# Altium PCB Thermostat_PCB.PcbDoc
Units mm, origin at the board's own origin, x right, y up, seen from the top; angles counter-clockwise.
Board outline 152.4 x 101.6 mm, 2 copper layers (Top Layer, Bottom Layer); 75 components, 95 nets, 262 pads, 48 vias.
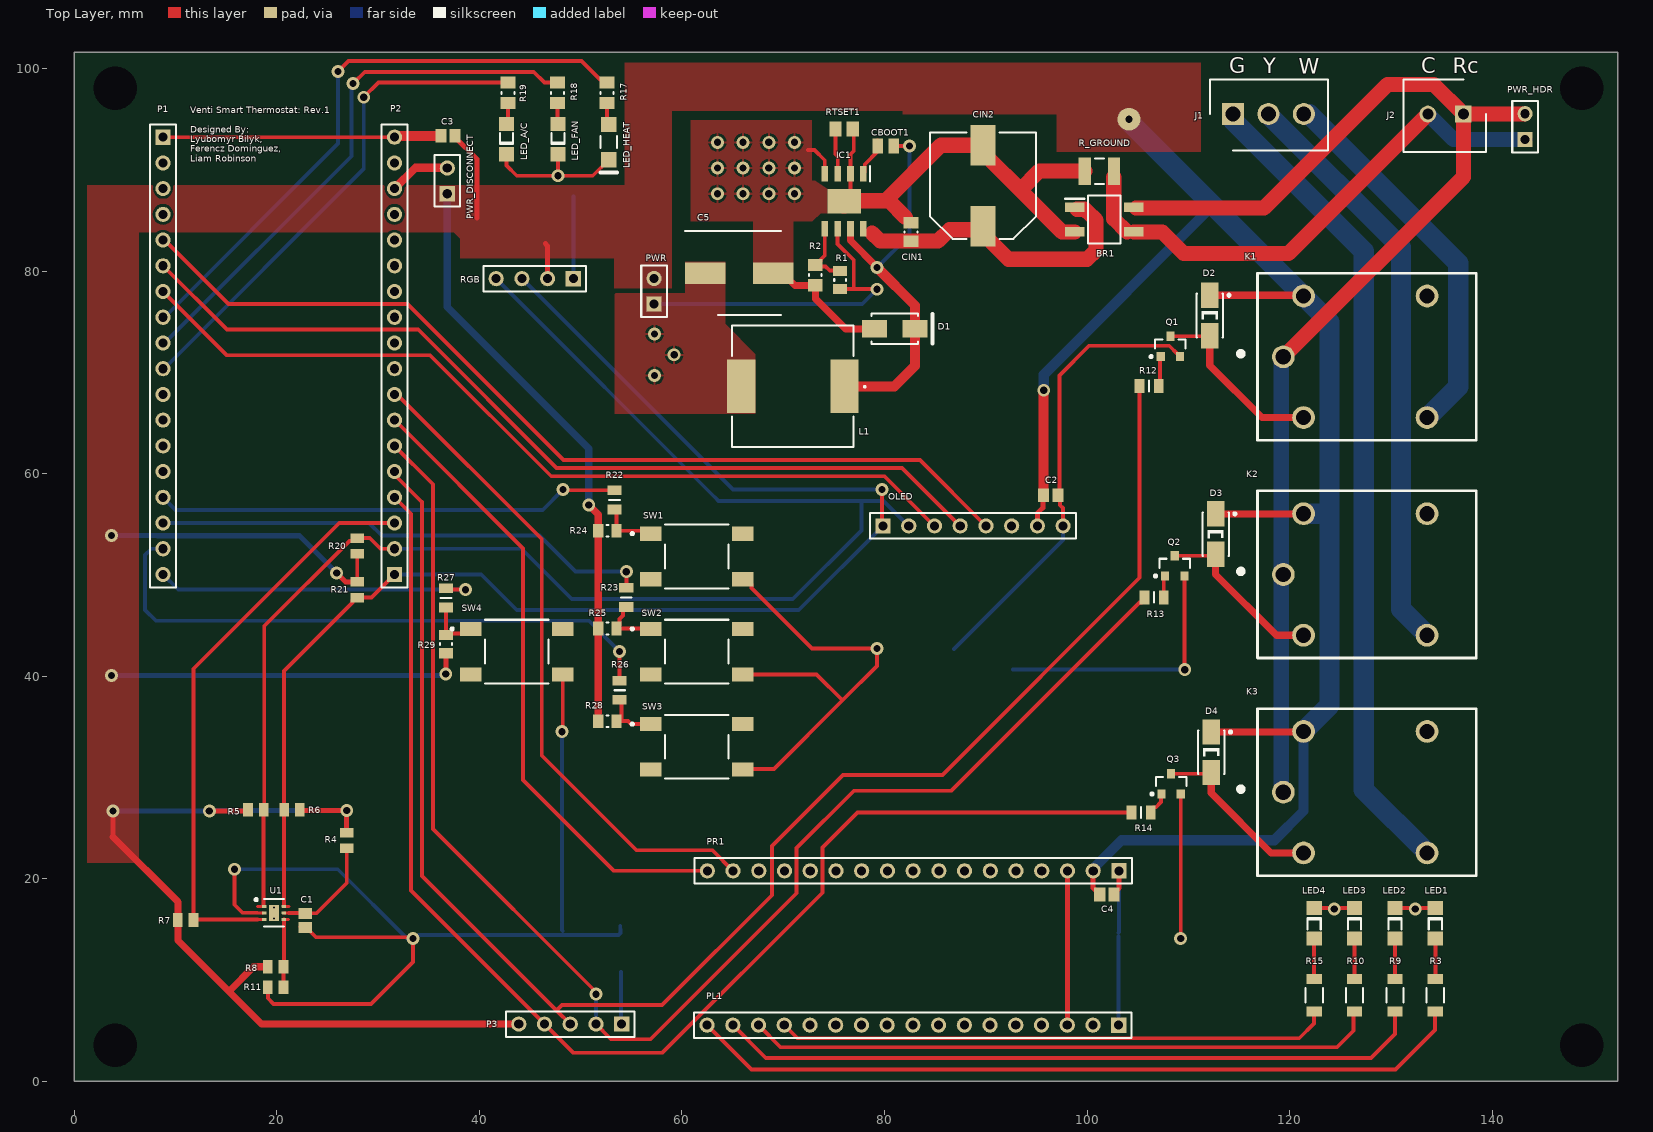
[diagram p0: Top Layer view]
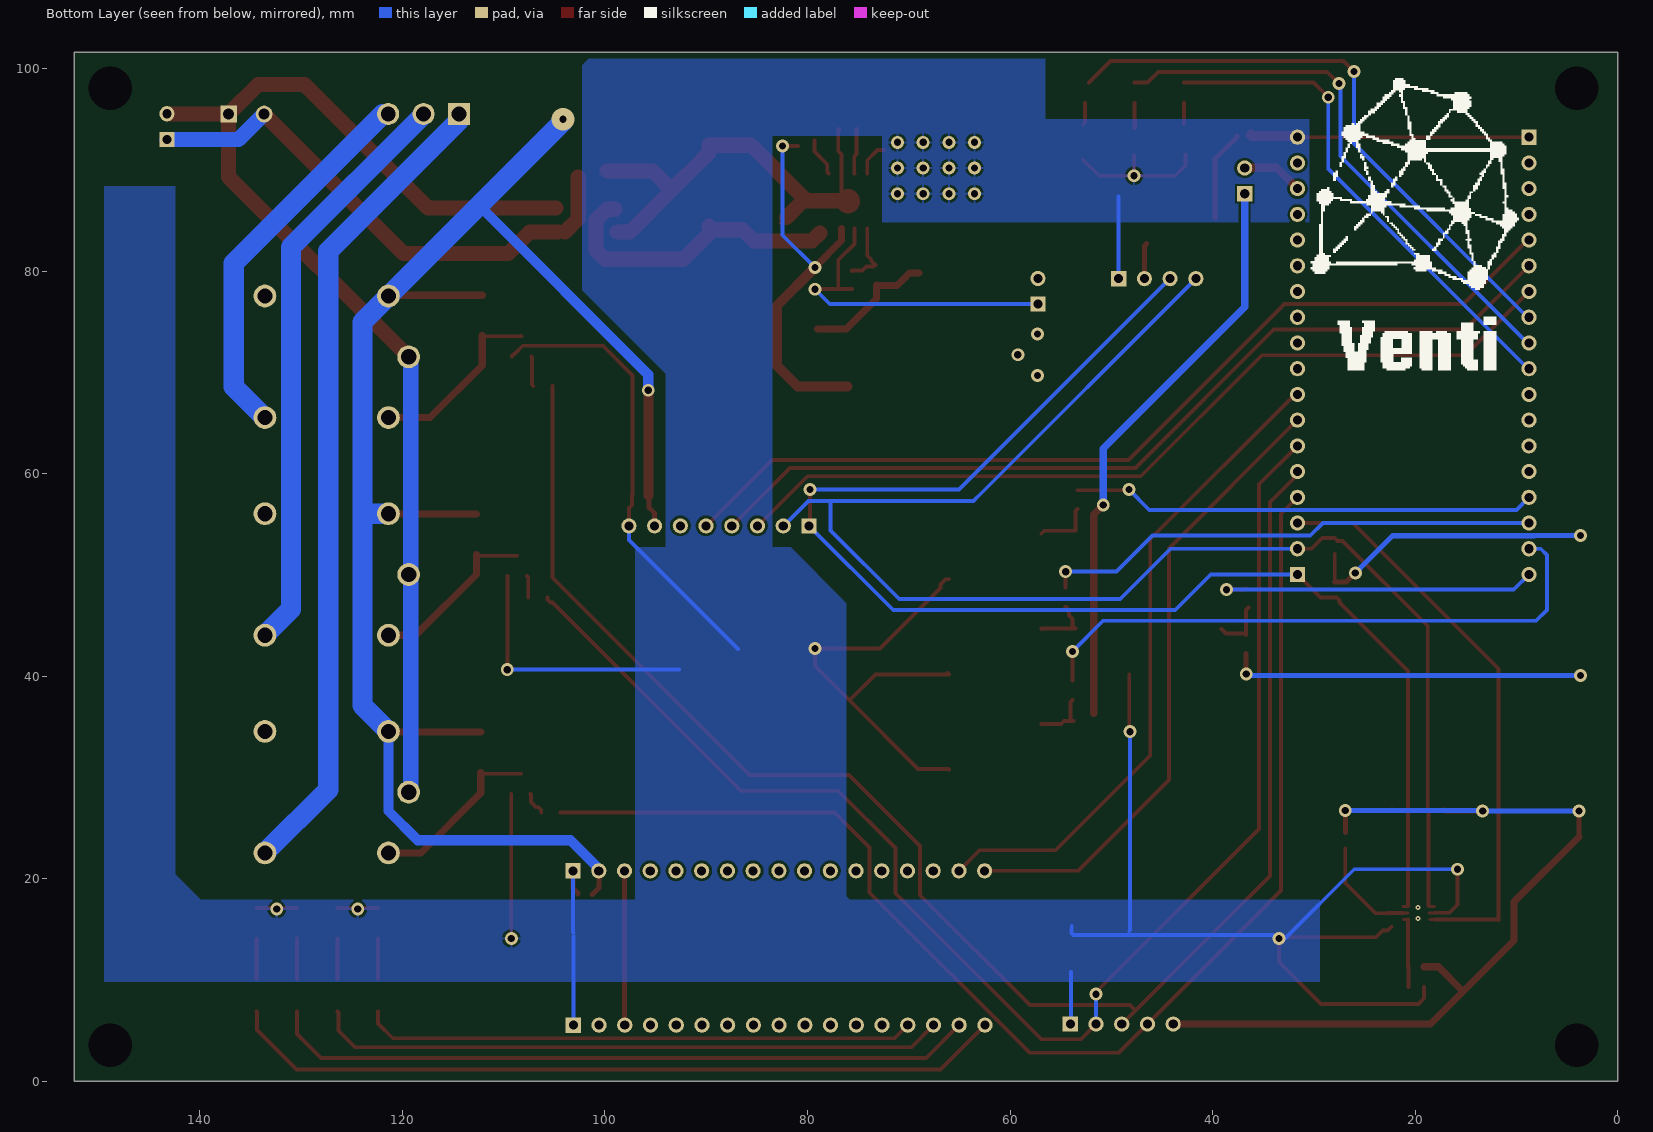
[diagram p1: Bottom Layer view, seen from below]
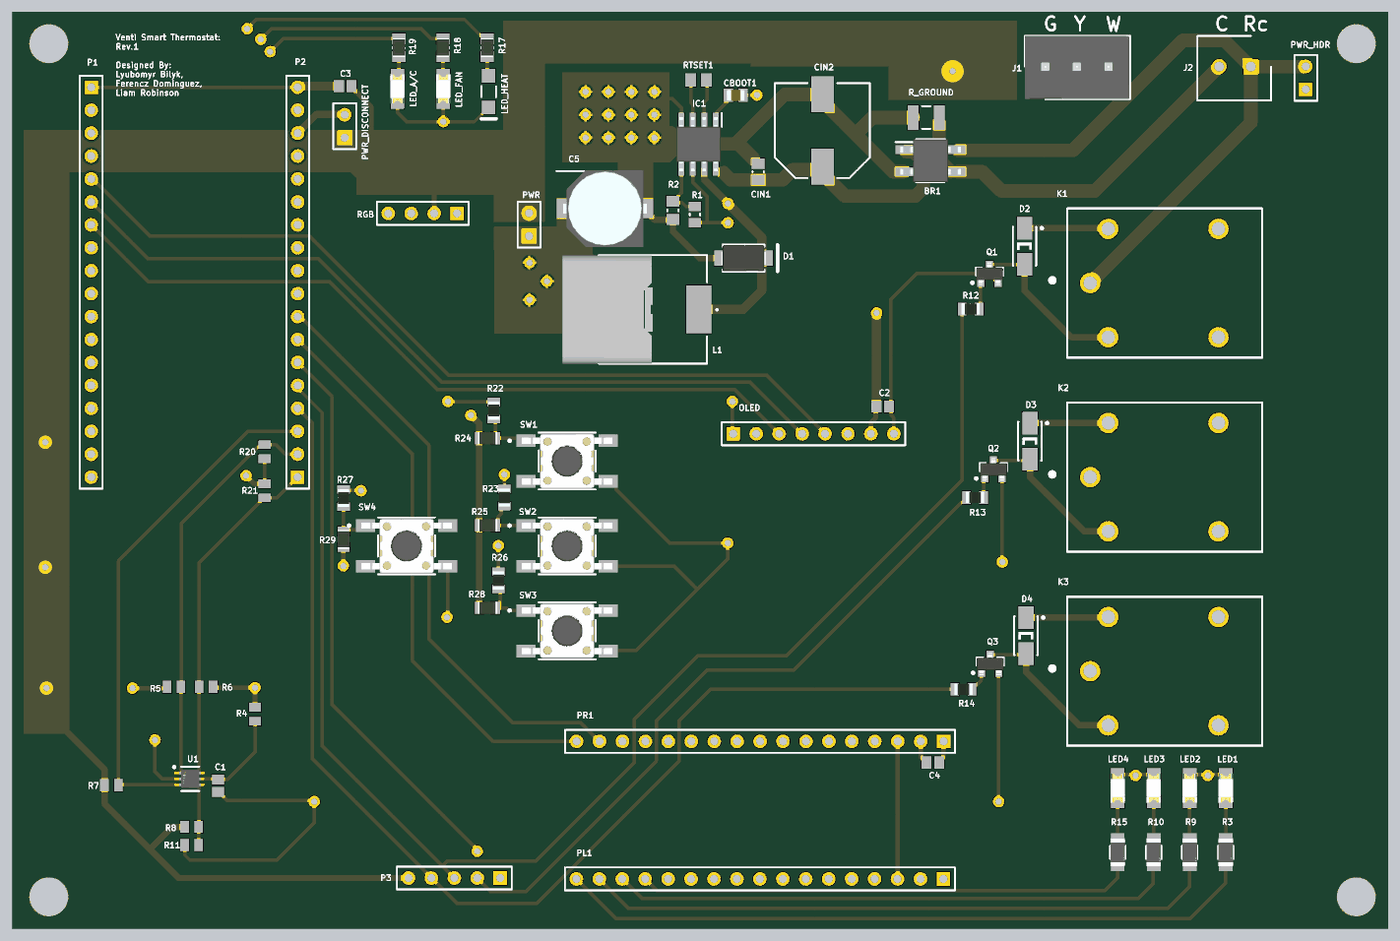
[diagram p2: 3D render of the assembled board from above, using the file's embedded part models]

## Layer stack, top to bottom
Top Solder: solder mask 0.0102, Solder Resist, Dk 3.5
Top Layer: signal copper 0.0356
Dielectric 1: dielectric 0.32, FR-4, Dk 4.8
Bottom Layer: signal copper 0.0356
Bottom Solder: solder mask 0.0102, Solder Resist, Dk 3.5

## Board outline
0,0 152.4,0 152.4,101.6 0,101.6

## Design rules (kind name [scope] priority, off if disabled: settings)
Clearance [All] p1: gap=0.254 ignorepadtopadclearanceinfootprint=FALSE except(0: Arc-Hole Track-Hole SMDPad-Hole THPad-Hole Via-Hole Fill-Hole Poly-Hole Region-Hole Text-Hole)
PolygonConnect [All] p1: connectstyle=Relief reliefconductorwidth=0.254 reliefentries=4 polygonreliefangle="90 Angle" airgapwidth=0.254
RoutingVias [All] p1: holewidth=0.711 width=1.27 viastyle="Through Hole" minholewidth=0.711 minwidth=1.27 maxholewidth=0.711 maxwidth=1.27
SolderMaskExpansion [All] p1: expansion=0.102
Width Width_1 [InNet('NetBR1_2')] p1: maxlimit=5 minlimit=1.5 preferedwidth=2
Width 24VAC_Width [InNet('24 VAC')] p2: maxlimit=5 minlimit=1.5 preferedwidth=2
Width 3V3_Width [InNet('+3.3V')] p3: maxlimit=2 minlimit=0.5 preferedwidth=1
Width [All] p4: maxlimit=5 minlimit=0.254 preferedwidth=0.254
30 further rules are at their usual default settings.

## Classes and differential pairs
component class "U_Wall Thermostat": D2 D3 D4 J1 J2 K1 K2 K3 PWR_HDR Q1 Q2 Q3 R12 R13 R14
component class "U_Thermostat Power Supply": BR1 C5 CBOOT1 CIN1 CIN2 D1 IC1 L1 PWR R1 R2 R_GROUND RTSET1
component class U_temp_sensor: C1 R4 R5 R6 R7 R8 R11 U1
component class U_sparkfun_nrf52: PL1 PR1
component class U_Heltec_ESP32: P1 P2
component class U_Buttons: R22 R23 R24 R25 R26 R27 R28 R29 SW1 SW2 SW3 SW4
component class Thermostat_Master: C2 C3 C4 LED1 LED2 LED3 LED4 LED_A/C LED_FAN LED_HEAT OLED P3 PWR_DISCONNECT R3 R9 R10 R15 R17 R18 R19 R20 R21 RGB

## Components (designator, comment, footprint, x,y, rotation, side; value= is the part's Value field where it differs from the comment)
BR1 "MB1S" SOP245P670X290-4N 101.702,85.09 r0 top
C1 "0.1u" CAPC2013X145X50LL20T25 22.809,15.864 r90 top
C2 "0.1u" CAPC2013X145X50LL20T25 96.418,57.861 r180 top
C3 "0.1u" CAPC2013X145X50LL20T25 36.892,93.347 r0 top
C4 "0.1u" CAPC2013X145X50LL20T25 101.956,18.44 r180 top
C5 "UUD1E221MNL1GS" CAPAE830X1050N 65.644,79.793 r0 top
CBOOT1 "C0805C103K1RACTU" CAPC2012X88N 80.124,92.335 r180 top
CIN1 "CAP 220nF 50V 0805(2012)" CAPC0805(2012)145_N 82.614,83.857 r270 top value=220nF
CIN2 "220 µF 50V" NIC-CAPA2-10X10_V 89.726,88.429 r90 top
D1 "B360A-13-F" DIOD-B360A_V 81.007,74.295 r0 top
D2 "S1M-13-F" DIOD-S1M-13-F-SMA-2_V 112.116,75.609 r90 top
D3 "S1M-13-F" DIOD-S1M-13-F-SMA-2_V 112.7,54.026 r90 top
D4 "S1M-13-F" DIOD-S1M-13-F-SMA-2_V 112.268,32.48 r90 top
IC1 "A8498SLJTR-T" SOIC127P600X170-9N 76.01,86.905 r270 top
J1 "OSTTE030161" SHDR3W90P0X350_1X3_1150X700X840P 114.412,95.504 r0 top
J2 "OSTTE020161" SHDR2W90P0X350_1X2_800X700X855P 137.16,95.504 r180 top
K1 "G5LE-14_DC3" G5LE-14_SPDT 121.38,65.532 r0 top
K2 "G5LE-14_DC3" G5LE-14_SPDT 121.38,44.038 r0 top
K3 "G5LE-14_DC3" G5LE-14_SPDT 121.38,22.544 r0 top
L1 "SRR1210-680M" SRR1210 70.95,68.617 r90 top
LED1 "" 1206_A 134.391,15.596 r270 top
LED2 "" 1206_A 130.404,15.596 r270 top
LED3 "" 1206_A 126.416,15.596 r270 top
LED4 "" 1206_A 122.428,15.596 r270 top
LED_A/C "" 1206_A 42.672,93.033 r90 top
LED_FAN "" 1206_A 47.752,93.033 r90 top
LED_HEAT "LTST-C150KRKT" LTST-C150KRKT_V 52.773,92.733 r270 top
OLED "Header 8" HDR1X8 79.858,54.839 r0 top
P1 "Header 18" HDR1X18 8.763,93.218 r270 top locked
P2 "Header 18" HDR1X18 31.623,50.038 r90 top
P3 "Header 5" HDR1X5 54.051,5.639 r180 top
PL1 "Header 17" HDR1X17 103.124,5.537 r180 top locked
PR1 "Header 17" HDR1X17 103.149,20.777 r180 top
PWR "Header 2" HDR1X2 57.252,76.733 r90 top
PWR_DISCONNECT "Header 2" HDR1X2 36.83,87.63 r90 top
PWR_HDR "Header 2" HDR1X2 143.256,92.989 r90 top
Q1 "MMBT3904-7-F" DIOD-SOT23-3_V 108.229,72.558 r90 top
Q2 "MMBT3904-7-F" DIOD-SOT23-3_V 108.661,50.892 r90 top
Q3 "MMBT3904-7-F" DIOD-SOT23-3_V 108.306,29.362 r90 top
R1 "RC0805FR-076R34L" RESC2013X60X35NL10T20 75.616,79.121 r270 top
R2 "RC0805JR-072KL" RESC2013X60X35ML10T20 73.177,79.594 r90 top
R3 "" FP-RC1206-MFG 134.391,8.484 r270 top value=0O
R4 "470" RESC2013X70X40LL20T20 26.899,23.774 r90 top
R5 "5k" RESC2013X70X40LL20T20 17.932,26.797 r180 top
R6 "5k" RESC2013X70X40LL20T20 21.501,26.797 r0 top
R7 "5k" RESC2013X70X40LL20T20 10.998,15.926 r180 top
R8 "0" RESC2013X70X40LL20T20 19.888,11.303 r180 top
R9 "" FP-RC1206-MFG 130.404,8.484 r270 top value=0O
R10 "" FP-RC1206-MFG 126.416,8.484 r270 top value=0O
R11 "0" RESC2013X70X40LL20T20 19.888,9.296 r0 top
R12 "1.0K" RESC2012X60N 106.136,68.656 r0 top
R13 "1.0K" RESC2012X60N 106.629,47.777 r0 top
R14 "1.0K" RESC2012X60N 105.344,26.543 r0 top
R15 "" FP-RC1206-MFG 122.428,8.484 r270 top value=0O
R17 "RC0805FR-07100RL" RESC2013X60X35ML10T20 52.599,97.603 r90 top
R18 "RC0805FR-07100RL" RESC2013X60X35ML10T20 47.712,97.603 r90 top
R19 "RC0805FR-07100RL" RESC2013X60X35ML10T20 42.825,97.603 r90 top
R20 "5k" RESC2013X70X40LL20T20 27.94,52.858 r90 top
R21 "5k" RESC2013X70X40LL20T20 27.94,48.527 r270 top
R22 "1.0K" RESC2012X60N 53.34,57.404 r90 top
R23 "1.0K" RESC2012X60N 54.508,47.777 r90 top
R24 "RC0805FR-0710KL" RESC2013X60X35NL10T20 52.64,54.356 r0 top
R25 "RC0805FR-0710KL" RESC2013X60X35NL10T20 52.64,44.704 r0 top
R26 "1.0K" RESC2012X60N 53.848,38.608 r90 top
R27 "1.0K" RESC2012X60N 36.703,47.727 r90 top
R28 "RC0805FR-0710KL" RESC2013X60X35NL10T20 52.64,35.56 r0 top
R29 "RC0805FR-0710KL" RESC2013X60X35NL10T20 36.703,43.155 r90 top
R_GROUND "CRCW12100000Z0EA" RESC3225X60X45NL20T20 101.219,89.865 r180 top
RGB "Header 4" HDR1X4 49.276,79.248 r180 top
RTSET1 "ERA6AEB6342V" RESC2013X60X40NL20T25 76.01,94.017 r180 top
SW1 "1571563-9" FP-1571563-9-MFG 61.468,51.816 r0 top
SW2 "1571563-9" FP-1571563-9-MFG 61.468,42.418 r0 top
SW3 "1571563-9" FP-1571563-9-MFG 61.468,33.02 r0 top
SW4 "1571563-9" FP-1571563-9-MFG 43.688,42.418 r0 top
U1 "TMP116NAIDRVT" FP-DRV0006A-MFG 19.726,16.624 r0 top

## Footprints (in the part's own frame and the unit in brackets; to place one, negate y for a bottom-side part, rotate by r counter-clockwise, add the part's x,y. Pads: shape width x height; smd on the part's side, far side on the other; paste and mask are expansions set on the pad)
1206_A [mm] "Chip LED, 2-Leads, Body 3.2x1.6mm, IPC Medium Density"
  rect 1.4x1.5 smd: 1(-1.5,0) 2(1.5,0)
  silkscreen extent -0.5,-0.66 0.6,0.65, body extent -1.6,-0.8 1.6,0.8, height 0.68
CAPAE830X1050N [mm]
  rect 4x2.15 smd: 1(-3.35,0) 2(3.35,0)
  silkscreen extent -5.35,-4.15 4.15,4.15, body extent -4.65,-4.25 4.65,4.25, height 10.5
CAPC0805(2012)145_N [mm] "Chip Capacitor, Body 2.0x1.2mm, Height 1.45mm, IPC Medium Density"
  rect 1.15x1.45 smd: 1(-0.9,0) 2(0.9,0)
  silkscreen extent -0.05,-0.62 0.05,0.63, body extent -1.1,-0.72 1.1,0.73, height 1.45
CAPC2012X88N [mm]
  rect 1.02x1.47 smd: 1(-0.8,0) 2(0.8,0)
  body extent -1,-0.63 1,0.63, height 0.88
CAPC2013X145X50LL20T25 [mm] "Chip Capacitor, 2-Leads, Body 2.00x1.25mm, IPC High Density"
  rect 1.1x1.35 smd: 1(-0.7,0) 2(0.7,0)
  body extent -1.1,-0.72 1.1,0.72, height 1.45
DIOD-B360A_V [mm] "Molded Diode, 2-Leads, Body 4.60x2.92mm"
  rect 2.5x1.7 smd: 1(-2,0) 2(2,0)
  silkscreen extent -2.3,-1.5 3.75,1.5, body extent -2.52,-1.46 2.52,1.46, height 2.3
DIOD-S1M-13-F-SMA-2_V [mm] "SMD, 2-Leads, Body 4.3x2.605mm, Height 2.3mm"
  rect 2.5x1.7 smd: 1(-2,0) 2(2,0)
  silkscreen extent -2.15,-2.03 2.15,1.3, body extent -2.15,-1.3 2.15,1.3, height 2.3
DIOD-SOT23-3_V [mm] "SOT23, 3-Leads, Body 3x1.4mm, Pitch 0.95mm"
  rect 0.9x0.8 smd: 1(-1,0.95) 2(-1,-0.95) 3(1,0)
  silkscreen extent -1.12,-1.5 0.7,2.02, body extent -1.25,-1.5 1.25,1.5, height 1.1
FP-1571563-9-MFG [mm]
  rect 2.1x1.4 smd paste+0 mask+0: 1(-4.55,2.25) 2(4.55,2.25) 3(-4.55,-2.25) 4(4.55,-2.25)
  silkscreen extent -6.5,-3.15 3.15,3.15, body extent -5.7,-3.25 5.7,3.25, height 0.25
FP-DRV0006A-MFG [mm]
  rrect33% 0.45x0.3 smd paste+0 mask+0: 1(-0.975,0.65) 2(-0.975,0) 3(-0.975,-0.65) 4(0.975,-0.65) 5(0.975,0) 6(0.975,0.65)
  rrect10% 1x1.6 smd paste-1000 mask+0: 7(0,0)
  silkscreen extent -1.89,-1.35 1,1.43, body extent -1.3,-1.15 1.3,1.15, height 0.25
FP-RC1206-MFG [mm]
  rect 1x1.5 smd paste+0 mask+0: 1(-1.6,0) 2(1.6,0)
  silkscreen extent -0.72,-0.85 0.72,0.85, body extent -2.2,-0.95 2.2,0.95, height 0.25
G5LE-14_SPDT [mm]
  round 2.25 hole 1.5: 1(-2,6) 2(0,0) 3(12.2,0) 4(12.2,12) 5(0,12)
  silkscreen extent -6.41,-2.25 17.05,14.25
HDR1X2 [mm] "Connector; Header; 2 Position"
  rect 1.5x1.5 hole 0.9: 1(0,0)
  round 1.5 hole 0.9: 2(2.54,0)
  silkscreen extent -1.27,-1.27 3.81,1.27
HDR1X4 [mm] "Connector; Header; 4 Position"
  rect 1.5x1.5 hole 0.9: 1(0,0)
  round 1.5 hole 0.9: 2(2.54,0) 3(5.08,0) 4(7.62,0)
  silkscreen extent -1.27,-1.27 8.89,1.27
HDR1X5 [mm] "Connector; Header; 5 Position"
  rect 1.5x1.5 hole 0.9: 1(0,0)
  round 1.5 hole 0.9: 2(2.54,0) 3(5.08,0) 4(7.62,0) 5(10.16,0)
  silkscreen extent -1.27,-1.27 11.43,1.27
HDR1X8 [mm] "Connector; Header; 8 Position"
  rect 1.5x1.5 hole 0.9: 1(0,0)
  round 1.5 hole 0.9: 2(2.54,0) 3(5.08,0) 4(7.62,0) 5(10.16,0) 6(12.7,0) 7(15.24,0) 8(17.78,0)
  silkscreen extent -1.27,-1.27 19.05,1.27
HDR1X17 [mm] "Connector; Header; 17 Position"
  rect 1.5x1.5 hole 0.9: 1(0,0)
  round 1.5 hole 0.9: 2(2.54,0) 3(5.08,0) 4(7.62,0) 5(10.16,0) 6(12.7,0) 7(15.24,0) 8(17.78,0) 9(20.32,0) 10(22.86,0) 11(25.4,0) 12(27.94,0) 13(30.48,0) 14(33.02,0) 15(35.56,0) 16(38.1,0) 17(40.64,0)
  silkscreen extent -1.27,-1.27 41.91,1.27
HDR1X18 [mm] "Connector; Header; 18 Position"
  rect 1.5x1.5 hole 0.9: 1(0,0)
  round 1.5 hole 0.9: 2(2.54,0) 3(5.08,0) 4(7.62,0) 5(10.16,0) 6(12.7,0) 7(15.24,0) 8(17.78,0) 9(20.32,0) 10(22.86,0) 11(25.4,0) 12(27.94,0) 13(30.48,0) 14(33.02,0) 15(35.56,0) 16(38.1,0) 17(40.64,0) 18(43.18,0)
  silkscreen extent -1.27,-1.27 44.45,1.27
LTST-C150KRKT_V [mm] "SMD, 2-Leads, Body 3.2x1.6mm"
  rect 1.5x1.5 smd: 1(-1.75,0) 2(1.75,0)
  silkscreen extent -0.6,-0.8 3,0.8, body extent -1.6,-0.8 1.6,0.8, height 1.2
NIC-CAPA2-10X10_V [mm] "Aluminum Electrolytic Capacitor, Diameter 10mm, Height 10.8mm, Pitch 8mm"
  rect 4x2.5 smd: 1(-4,0) 2(4,0)
  silkscreen extent -5.25,-5.25 5.25,5.25, body extent -4.96,-4.99 5,4.99, height 10.8
RESC2012X60N [mm]
  rect 0.95x1.4 smd: 1(-0.95,0) 2(0.95,0)
  silkscreen extent 0,-0.53 0,0.53, body extent -1,-0.63 1,0.63, height 0.6
RESC2013X60X35ML10T20 [mm] "Chip Resistor, 2-Leads, Body 2.00x1.25mm, IPC Low Density"
  rect 1.2x1.45 smd: 1(-1,0) 2(1,0)
  silkscreen extent -0.1,-0.63 0.1,0.63, body extent -1.05,-0.67 1.05,0.67, height 0.6
RESC2013X60X35NL10T20 [mm] "Chip Resistor, 2-Leads, Body 2.00x1.25mm, IPC Medium Density"
  rect 1x1.35 smd: 1(-0.9,0) 2(0.9,0)
  silkscreen extent -0.1,-0.58 0.1,0.58, body extent -1.05,-0.67 1.05,0.67, height 0.6
RESC2013X60X40NL20T25 [mm] "Chip Resistor, 2-Leads, Body 2.00x1.25mm, IPC Medium Density"
  rect 1.2x1.45 smd: 1(-0.85,0) 2(0.85,0)
  body extent -1.1,-0.72 1.1,0.72, height 0.6
RESC2013X70X40LL20T20 [mm] "Chip Resistor, 2-Leads, Body 2.00x1.25mm, IPC High Density"
  rect 0.95x1.35 smd: 1(-0.775,0) 2(0.775,0)
  body extent -1.1,-0.72 1.1,0.72, height 0.7
RESC3225X60X45NL20T20 [mm] "Chip Resistor, 2-Leads, Body 3.20x2.50mm, IPC Medium Density"
  rect 1.2x2.7 smd: 1(-1.45,0) 2(1.45,0)
  silkscreen extent -0.45,-1.25 0.45,1.25, body extent -1.7,-1.35 1.7,1.35, height 0.6
SHDR2W90P0X350_1X2_800X700X855P [mm]
  rect 1.65x1.65 hole 1.1: 1(0,0)
  round 1.65 hole 1.1: 2(3.5,0)
  silkscreen extent -2.25,-3.4 5.9,3.75
SHDR3W90P0X350_1X3_1150X700X840P [mm]
  rect 2.175x2.175 hole 1.45: 1(0,0)
  round 2.175 hole 1.45: 2(3.5,0) 3(7,0)
  silkscreen extent -2.25,-3.6 9.4,3.4, body extent -2.25,-3.6 9.25,3.4, height 8.4
SOIC127P600X170-9N [mm]
  rect 1.525x0.65 smd: 1(-2.712,1.905) 2(-2.712,0.635) 3(-2.712,-0.635) 4(-2.712,-1.905) 5(2.712,-1.905) 6(2.712,-0.635) 7(2.712,0.635) 8(2.712,1.905)
  rect 2.41x3.3 smd: 9(0,0)
  silkscreen extent -3.47,2.58 -1.95,2.58, body extent -3,-2.45 3,2.45, height 1.7
SOP245P670X290-4N [mm]
  rect 1.925x0.95 smd: 1(-2.912,1.225) 2(-2.912,-1.225) 3(2.912,-1.225) 4(2.912,1.225)
  silkscreen extent -3.88,-2.36 1.6,2.36, body extent -3.35,-2.36 3.35,2.36, height 2.9
SRR1210 [mm]
  rect 5.3x2.8 smd: 1(0,-5.1) 2(0,5.1)
  silkscreen extent -6,-7.19 6,6, body extent -6,0 6,10, height 6

## Part data
BR1: "Bridge Rectifier", Manufacturer_Name="ON Semiconductor", Mouser Part Number=512-MB1S, Arrow Part Number=MB1S, Arrow Price/Stock=https://www.arrow.com/en/products/mb1s/on-semiconductor, Datasheet Link=http://www.onsemi.com/pub/Collateral/MB8S-D.PDF, Height=2.9mm, Manufacturer_Part_Number=MB1S, Mouser Price/Stock=https://www.mouser.co.uk/ProductDetail/ON-Semiconductor-Fairchild/MB1S?qs=DPwKKv7J1fwyOHno5d2nnw%3D%3D
C1 C2 C3 C4: library part CMP-2007-01258-1, "C0805C104Z5VACTU", Manufacturer=Kemet, Part Number=C0805C104Z5VACTU
C5: "Capacitor Polarised", Manufacturer_Name=Nichicon, Mouser Part Number=647-UUD1E221MNL, Arrow Part Number=UUD1E221MNL1GS, Arrow Price/Stock=https://www.arrow.com/en/products/uud1e221mnl1gs/nichicon, Datasheet Link=https://www.mouser.com/datasheet/2/293/e-uud-1513238.pdf, Height=10.5mm, Manufacturer_Part_Number=UUD1E221MNL1GS, Mouser Price/Stock=https://www.mouser.com/Search/Refine.aspx?Keyword=647-UUD1E221MNL
CBOOT1: "Capacitor", Manufacturer_Name=Kemet, Mouser Part Number=80-C0805C103K1R, Arrow Part Number=C0805C103K1RACTU, Arrow Price/Stock=https://www.arrow.com/en/products/c0805c103k1ractu/kemet-corporation, Datasheet Link=http://uk.rs-online.com/web/p/products/2989309, Height=0.88mm, Manufacturer_Part_Number=C0805C103K1RACTU, Mouser Price/Stock=https://www.mouser.co.uk/ProductDetail/KEMET/C0805C103K1RACTU?qs=5x48ZXzl2vJIYri9GAI7yw%3D%3D
CIN1: library part CMP-1036-04552-1, "CAP 220nF 50V ±10% 0805 (2012 Metric) Thickness 1.45mm SMD", Case-EIA=0805, Case-Metric=2012, Rated voltage="50 V", Tolerance=±10%, Max Thickness="1.45 mm", Technology=SMT
CIN2: library part CMP-0687-00004-1, "Aluminum Electrolytic Capacitor, UD Series, Low Impedance, 220 uF, 50 V, + / - 20%, -55 to 105 degC, Chip Type, 10 x 10 mm D x L, Pb-Free, Reel", Manufacturer=Nichicon, PartNumber=UUD1H221MNL1GS, Rated Capacitance="220 uF", Rated Ripple Current (at 100kHz)="670 mA", Rated voltage="50 V", Tolerance Rated Capacitance="-20 to 20%", ComponentLink1Description="Manufacturer URL", ComponentLink1URL=http://www.nichicon.co.jp/, ComponentLink2Description=Datasheet, ComponentLink2URL=http://products.nichicon.co.jp/en/pdf/XJA043/e-ud.pdf, ComponentLink3Description="Package Specification", ComponentLink3URL=http://products.nichicon.co.jp/en/pdf/XJA043/e-ud.pdf, DatasheetVersion=08/2012, Diameter="10 mm", Endurance Time="5000 h", Impedance="0.18 Ohm", Length="10 mm", Mounting Technology="Surface Mount", PackageDescription="2-Pin Surface Mount Device, Diameter 10 mm, Height 10 mm, Pitch 8 mm", PackageReference=CAPAE-D10H10, Packing="Dia382mm Reel", RoHS=TRUE
D1: library part CMP-2000-05898-1, "Schottky Barrier Rectifier, 3 A, -55 to 150 degC, 2-Pin Molded, RoHS, Tape and Reel", If - Forward Current=3A, Ifsm - Forward Surge Current=80A, Ir - Reverse Current=500uA, Manufacturer=DiodesIncorporated, Maximum Operating Temperature=+125C, Minimum Operating Temperature=-55C, Operating Temperature Range=-55Cto+125C, Package / Case=SMA, Package Description="2-Pin Surface Mount Device, Body 4.3 x 2.605 mm", Package Reference=B360A, Vf - Forward Voltage=0.7V, Vrrm - Repetitive Reverse Voltage=60V, Brand=DiodesIncorporated, Configuration=Single, Datasheet URL=https://datasheet.ciiva.com/914/ds30891-914080.pdf, Datasheet Version="Rev. 15-2, 09/2014", Factory Pack Quantity=5000, Height=2.3mm, Length=4.6mm, Manufacturer URL=http://www.diodes.com/, Mounting Style=SMD/SMT, Mounting Technology=SurfaceMount, Packaging=Reel, Product=SchottkyDiodes, Product Category=SchottkyDiodes&Rectifiers, RoHS=True, Series=B360, Technology=Si, Termination Style=SMD/SMT, Type=SchottkyBarrierRectifier, Unit Weight=0.002258oz, Width=2.92mm
D2 D3 D4: library part CMP-0639-00001-1, "Surface Mount Glass Passivated Rectifier, 1000V, 1 A, -65 to 125 degC, 2-Pin SMA Package, RoHS, Tape and Reel", Forward Voltage Drop VF (V)=1.1, Manufacturer="Diodes Inc", Maximum Average Rectified Current IO (A)=1, Maximum Peak Forward Surge Current IFSM (A)=30, Maximum Reverse Current IR (uA)=5, Operating Temperature Range="-65 to 150 degC", Peak Repetitive Reverse Voltage VRRM (V)=1000, Total Capacitance CT (pF)=10, ComponentLink1Description="Manufacturer URL", ComponentLink1URL=http://www.diodes.com/, ComponentLink2Description=Datasheet, ComponentLink2URL=http://diodes.com/datasheets/ds16003.pdf, ComponentLink3Description="Package Specification", ComponentLink3URL=http://diodes.com/datasheets/ds16003.pdf, DatasheetVersion="Rev. 22 - 2", Mounting Technology="Surface Mount", PackageDescription="2-Pin SMD, Body 4.3 x 2.605 mm, Height 2.3 mm", PackageReference=S1M-13-F-SMA-2, PackageVersion="Rev. 22 - 2", Packing="Tape and Reel", PartNumber=S1M-13-F, RoHS=TRUE
IC1: "Integrated Circuit", Manufacturer_Name="Allegro Microsystems", Arrow Part Number=A8498SLJTR-T, Arrow Price/Stock=https://www.arrow.com/en/products/a8498sljtr-t/allegro-microsystems, Datasheet Link=http://www.allegromicro.com/~/media/files/datasheets/a8498-datasheet.ashx, Height=1.7mm, Manufacturer_Part_Number=A8498SLJTR-T
J1 J2: "Connector", Manufacturer_Name="On-Shore Technology"
  J1: Arrow Part Number=OSTTE030161, Arrow Price/Stock=https://www.arrow.com/en/products/ostte030161/on-shore-technology, Datasheet Link=https://www.arrow.com/en/products/ostte030161/on-shore-technology, Height=8.4mm, Manufacturer_Part_Number=OSTTE030161
  J2: Arrow Part Number=OSTTE020161, Arrow Price/Stock=https://www.arrow.com/en/products/ostte020161/on-shore-technology, Datasheet Link=http://www.on-shore.com/wp-content/uploads/OSTTEXX0161.pdf, Height=8.55mm, Manufacturer_Part_Number=OSTTE020161
K1 K2 K3: "Relay or Contactor", Arrow Part Number="G5LE-14 DC3", Manufacturer_Name="Omron Electronics", Mouser Part Number=653-G5LE-14DC3, Datasheet Link=https://omronfs.omron.com/en_US/ecb/products/pdf/en-g5le.pdf, Manufacturer_Part_Number="G5LE-14 DC3", Mouser Price/Stock=https://www.mouser.com/Search/Refine.aspx?Keyword=653-G5LE-14DC3
L1: "Inductor", Manufacturer_Name=Bourns, Mouser Part Number=652-SRR1210-680M, Arrow Part Number=SRR1210-680M, Arrow Price/Stock=https://www.arrow.com/en/products/srr1210-680m/bourns, Datasheet Link=https://www.bourns.com/pdfs/SRR1210.pdf, Manufacturer_Part_Number=SRR1210-680M, Mouser Price/Stock=https://www.mouser.co.uk/ProductDetail/Bourns/SRR1210-680M?qs=4vvWAaIu%2Fq7jxuGAr15C2Q%3D%3D
LED1 LED2 LED3 LED4: library part CMP-1426-00016-1, "QTLP650C4TR / 1206 green led", Color="Bright Green", Manufacturer="Wuerth Elektronik", PartNumber=150120VS75000, ComponentLink1Description="Manufacturer URL", ComponentLink1URL=http://www.we-online.com, ComponentLink2Description=Datasheet, ComponentLink2URL=http://katalog.we-online.com/led/datasheet/150120VS75000.pdf, PackageReference=1206_A
LED_A/C: library part CMP-1426-00016-1, "QTLP650C4TR / 1206 green led", Color=Blue, PartNumber=LTST-C150TBKT, ComponentLink1Description="Manufacturer URL", ComponentLink1URL=http://www.we-online.com, ComponentLink2Description=Datasheet, ComponentLink2URL=http://katalog.we-online.com/led/datasheet/150120VS75000.pdf, PackageReference=1206_A
LED_FAN: library part CMP-1426-00016-1, "LTST-C150GKT / 1206 green led", Color="Bright Green", PartNumber=LTST-C150GKT, ComponentLink1Description="Manufacturer URL", ComponentLink1URL=http://www.we-online.com, ComponentLink2Description=Datasheet, ComponentLink2URL=http://katalog.we-online.com/led/datasheet/150120VS75000.pdf, PackageReference=1206_A
LED_HEAT: library part CMP-2000-06617-1, "LED Red, 62.5 mW, 50 mA, -30 to 85 degC, 2-Pin SMD, RoHS, Tape and Reel", Emitting Color=Red, Forward Current=30mA, Forward Voltage=2.4V, Manufacturer=Lite-On, Operating Temp Range=-55Cto85C, Operating Temperature Classification=Industrial, Package Description="2-Pin Surface Mount Device, Body 3.2 x 1.6 mm", Package Reference=C150KRKT, Package Type=ChipLed, Power Dissipation=75W, Reverse Voltage=5V, Test Current (It)=20mA, Chip Material=AlGaInP, Datasheet URL=http://optoelectronics.liteon.com/upload/download/DS-22-99-0149/S_110_LTST-C150KRKT.pdf, Datasheet Version="Rev. C, 01/2013", DELETED=Compliant, Dominant Wave Length=631nm, High Brightness=Yes, Lens Dimensions=2.06X1.6X0.6mm, Lum Intensity=54mcd, Luminous Intensity=54mcd, Main Category=ChipLED, Manufacturer URL=http://www.us.liteon.com/, Mounting=SurfaceMount, Mounting Technology=SurfaceMount, Number of  Elements=1, Packaging=TapeandReel, Peak Wavelength=639nm, Pin Count=2, Product Depth (mm)=1.6mm, Product Height (mm)=1.1mm, Product Length (mm)=3.2mm, Rad Hardened=No, Shape Type=Rectangular, Type=Uni-Color, Viewing Angle=130deg
OLED: "Header, 8-Pin", LatestRevisionDate=17-Jul-2002, LatestRevisionNote="Re-released for DXP Platform.", Publisher="Altium Limited"
P1 P2: "Header, 18-Pin", LatestRevisionDate=17-Jul-2002, LatestRevisionNote="Re-released for DXP Platform.", Publisher="Altium Limited"
P3: "Header, 5-Pin", LatestRevisionDate=17-Jul-2002, LatestRevisionNote="Re-released for DXP Platform.", Publisher="Altium Limited"
PL1 PR1: "Header, 17-Pin", LatestRevisionDate=17-Jul-2002, LatestRevisionNote="Re-released for DXP Platform.", Publisher="Altium Limited"
PWR PWR_DISCONNECT PWR_HDR: "Header, 2-Pin", LatestRevisionDate=17-Jul-2002, LatestRevisionNote="Re-released for DXP Platform.", Publisher="Altium Limited"
Q1 Q2 Q3: library part CMP-2000-04931-1, "NPN Small Signal Transistor, 40 V, 0.2 A, -55 to 150 degC, 3-Pin SOT23, RoHS, Tape and Reel", Collector- Base Voltage VCBO=60V, Collector- Emitter Voltage VCEO Max=40V, Collector-Emitter Saturation Voltage=0.3V, Continuous Collector Current=0.2A, DC Current Gain hFE Max=300, Emitter- Base Voltage VEBO=6V, Manufacturer=DiodesIncorporated, Maximum Operating Temperature=+150C, Minimum Operating Temperature=-55C, Package / Case=SOT-23, Package Description="3-Pin Small Outline Transistor, Body 2.9 x 1.3 mm, Pitch 0.96 mm", Package Reference=SOT23-3, Pd - Power Dissipation=310mW, Brand=DiodesIncorporated, Configuration=Single, Datasheet URL=http://download.siliconexpert.com/pdfs/2013/11/16/3/45/37/668/dds_/manual/1692ds30036.pdf, Datasheet Version="Rev. 21-2, 11/2013", DC Collector/Base Gain hfe Min=100, Factory Pack Quantity=3000, Gain Bandwidth Product fT=300MHz, Height=1mm, Length=3.05mm, Manufacturer URL=http://www.diodes.com/, Maximum DC Collector Current=0.2A, Mounting Style=SMD/SMT, Packaging=Reel, Product Category=BipolarTransistors-BJT, RoHS=True, Series=MMBT3904, Transistor Polarity=NPN, Unit Weight=0.000282oz, Width=1.4mm
R1: library part CMP-2001-01252-1, Manufacturer=Yageo, Part Number=RC0805FR-076R34L
R2: library part CMP-2001-01361-1, Manufacturer=Yageo, Part Number=RC0805JR-072KL
R3 R9 R10 R15: library part CMP-03412-007570-1, "360 ohms resistor  / 1206 package", Manufacturer=YAGEO, Manufacturer Part Number=RC1206JR-070RL, Package=RC1206, Power Rating=0.25W, Resistance=0O, Temperature="-55°C to +155°C", Temperature Coefficient=300ppm/°C, Temperature Range High=+155°C, Temperature Range Low=-55°C, Tolerance=5%, Voltage Rating=200V, Automotive=No, Category=Res, ComponentLink2Description=Datasheet, ComponentLink2URL=https://www.yageo.com/upload/media/product/productsearch/datasheet/rchip/PYu-RC_Group_51_RoHS_L_10.pdf, Composition="Thick Film", Device Class L1="Passive Components", Device Class L2=Resistors, Device Class L3="Chip SMD Resistors", Digikey Description="RES SMD 0 OHM JUMPER 1/4W 1206", Footprint Url=https://www.yageo.com/upload/website/yageo_PYu-R_Mount_10_19050818_343.pdf, Height=0.65mm, Ipc Land Pattern Name=RESC310160X55, Lead Free=Yes, Mouser Description="Resistor: thick film; SMD; 1206; 0O; 0.25W; ±5%; -55÷155°C", Octopart=https://octopart.com/rc1206jr-070rl-yageo-40025601, RoHS=TRUE, Series=RC
R4: library part CMP-2001-00419-1, "ERJ-6GEYJ471V", Manufacturer=Panasonic, Part Number=ERJ-6GEYJ471V
R5 R6 R7 R8 R11 R20 R21: library part CMP-2001-00419-1, "2012", Manufacturer=Panasonic, Part Number=ERJ-6GEYJ471V
R12 R13 R14 R22 R23 R26 R27: library part RC0805JR-071KL, "Resistor", Manufacturer_Name="YAGEO (PHYCOMP)", Mouser Part Number=603-RC0805JR-071KL, Arrow Part Number=RC0805JR-071KL, Arrow Price/Stock=https://www.arrow.com/en/products/rc0805jr-071kl/yageo, Datasheet Link=http://www.yageo.com/documents/recent/PYu-RC_Group_51_RoHS_L_10.pdf, Height=0.6mm, Manufacturer_Part_Number=RC0805JR-071KL, Mouser Price/Stock=https://www.mouser.co.uk/ProductDetail/Yageo/RC0805JR-071KL?qs=KyGMWp10UkuwbpWNcSKeOA%3D%3D
R17 R18 R19: library part CMP-2100-03669-1, "Chip Resistor, 100 Ohm, +/-1%, 0.125 W, -55 to 155 degC, 0805 (2012 Metric), RoHS, Tape and Reel", Case Code (Imperial)=0805, Case Code (Metric)=2012, Manufacturer=Yageo, Max Operating Temperature=155degC, Max Power Dissipation=125mW, Min Operating Temperature=-55degC, Package Description="2-Pin Surface Mounted Device, Body 2 x 1.25 mm", Package Quantity=1, Resistance=100Ohm, Temperature Coefficient=100ppm/degreesC, Tolerance=1%, Voltage Rating=150V, Case/Package=0805, Composition=ThickFilm, Datasheet URL=http://www.yageo.com/NewPortal/yageodocoutput?fileName=/pdf/R-Chip/PYu-RC_Group_51_RoHS_L_5.pdf, Datasheet Version="Rev. 5, 10/2016", Depth=1.25mm, Height=0.024inch, Lead Free=LeadFree, Lead Pitch=0.4mm, Length=2mm, Manufacturer URL=http://www.yageo.com/, Military Standard=Not, Number of Pins=2, Number of Terminations=2, Package Reference=0805, Packaging=TapeandReel, Power Rating=125mW, REACH SVHC=Unknown, RoHSCompliant=true, Termination=SMD/SMT, Voltage Rating (DC)=150V, Width=0.049inch
R24 R25 R28 R29: library part CMP-1659-00013-4, "Chip Resistor, 10 KOhm, +/- 1%, 0.125 W, -55 to 155 degC, 0805 (2012 Metric), RoHS, Tape and Reel", Manufacturer=Yageo, Max Operating Temperature="155 degC", Min Operating Temperature="-55 degC", Package Quantity=5000, Voltage Rating="150 V", ComponentLink1Description="Manufacturer URL", ComponentLink1URL=http://www.yageo.com/, ComponentLink2Description=Datasheet, ComponentLink2URL=http://www.yageo.com/documents/recent/PYu-RC_Group_51_RoHS_L_04.pdf, DatasheetVersion="Rev. 4, 02/2016", Height="0.5 mm", Length="2 mm", Mount="Surface Mount", Mounting Technology="Surface Mount", PackageDescription="2-Pin Surface Mounted Device, Body 2 x 1.25 mm", PackageReference=0805, Packaging="Tape and Reel", Pins=2, REACH SVHC="No SVHC", RoHSCompliant=true
R_GROUND: library part CMP-2005-01987-1, Manufacturer="Vishay Dale", Part Number=CRCW12100000Z0EA
RGB: "Header, 4-Pin", LatestRevisionDate=17-Jul-2002, LatestRevisionNote="Re-released for DXP Platform.", Publisher="Altium Limited"
RTSET1: library part CMP-2001-00862-1, Manufacturer=Panasonic, Part Number=ERA6AEB6342V
SW1 SW2 SW3 SW4: library part CMP-03402-000005-1, "SWITCH TACTILE SPST-NO 0.05A 24V", Contact Current Rating=50mA, Contact Resistance=100mO, Manufacturer="TE Connectivity", Operating Force=160gf, Package=SMT_SW_6MM0_6MM0, Temperature="-35°C to +85°C", Temperature Range High=+85°C, Temperature Range Low=-35°C, Voltage Rating DC=24V, Automotive=No, Category=Switch, ComponentLink2Description=Datasheet, ComponentLink2URL=https://www.te.com/commerce/DocumentDelivery/DDEController?Action=showdoc&DocId=Customer+Drawing%7F2-1437565-7%7FV%7Fpdf%7FEnglish%7FENG_CD_2-1437565-7_V.pdf%7F1571563-9, Device Class L1=Electromechanical, Device Class L2=Switches, Device Class L3="Pushbutton Switches", Digikey Description="SWITCH TACTILE SPST-NO 0.05A 24V", Electromechanical Life=100000Cycles, Height=9.75mm, Lead Free=Yes, Manufacturer Part Number=1571563-9, Mount="Surface Mount", Mouser Description="Tactile Switches SPST OFF(ON) RND SMT MINI PB TACT SWITCH", Octopart=https://octopart.com/1571563-9-te+connectivity-41253969, RoHS=TRUE, Standoff Height=0.05mm, Throw Configuration=SPST-NO
U1: library part CMP-04948-000020-1, "SENSOR DIGITAL -55C-125C 6WSON", Ambient Temperature Range High=+150°C, Ambient Temperature Range Low=-55°C, Manufacturer="Texas Instruments", Max Supply Voltage=5.5V, Min Supply Voltage=1.9V, Operating Supply Current=3.5-135uA, Package=DRV0006A, Temperature="-55°C to +125°C", Temperature Range High=+125°C, Accuracy=0.2%, Automotive=No, Category=IC, ComponentLink2Description=Datasheet, ComponentLink2URL=http://www.ti.com/lit/ds/symlink/tmp116.pdf, Device Class L1=Sensors, Device Class L2="Temperature and Humidity Sensors", Device Class L3=unset, Digikey Description="SENSOR DIGITAL -55C-125C 6WSON", Height=0.8mm, Interface=I2C,SMBus, Lead Free=Yes, Manufacturer Part Number=TMP116NAIDRVT, Max Junction Temp=+150°C, Octopart=https://octopart.com/tmp116naidrvt-texas+instruments-82367759, Resolution=16bits, RoHS=TRUE, Standoff Height=0mm, Temperature Range Low=-55°C

## Free pads (board coordinates)
  round 1.524 hole 4.3: 2(4.064,3.556) 2(4.064,98.044) 2(148.844,3.556) 2(148.844,98.044)

## Via types
v1: diameter 1.27, hole 0.711, Top Layer to Bottom Layer, 45 vias
v2: diameter 0.5, hole 0.2, Top Layer to Bottom Layer, 2 vias
v3: diameter 2.25, hole 0.711, Top Layer to Bottom Layer, 1 vias

## Nets (pads, with @x,y where several pads share a name; then routed paths per layer and width w, separated by ;. In a path a pad name is that pad's centre, name@x,y a point inside that pad or via, vN(x,y) a via of type N, cw(c..) or ccw(c..) an arc to the next point about the centre after c; other vN are vias at no path point)
"24 VAC": BR1.4 J2.1 K1.1 K2.1 K3.1 PWR_HDR.2 | length 119
  Top Layer w1.5: BR1.4@104.826,86.233 117.475,86.233 129.667,98.425 134.239,98.425 J2.1 ; K1.1@119.412,71.532 137.16,89.28 J2.1 ; PWR_HDR.2@143.154,95.504 J2.1
  Bottom Layer w1.5: K3.1 119.236,28.688 119.236,29.218 119.177,29.278 119.177,49.632 K2.1@119.38,49.835 ; K2.1 119.236,50.182 119.236,50.712 119.177,50.772 119.177,71.126 119.38,71.329 K1.1
"24 VAC COM": BR1.3 J2.2 PWR_HDR.1 R_GROUND.1 | length 52.9
  Top Layer w1: BR1.3@103.943,83.865 BR1.3
  Top Layer w1.5: R_GROUND.1@102.641,89.265 102.641,85.166 BR1.3@103.943,83.865 ; BR1.3 107.422,83.865 109.552,81.736 119.892,81.736 J2.2
  Bottom Layer w1.5: J2.2 136.175,92.989 PWR_HDR.1
+3.3V: C2.2 C3.2 C4.2 D2.2 D3.2 D4.2 K1.5 K2.5 K3.5 OLED.7 P3.5 PR1.2 PWR.2 PWR_DISCONNECT.1 R4.2 R5.2 R6.2 R7.2 R8.2 R20.1 R21.1 R24.1 R25.1 R28.1 R29.1 RGB.2 | length 398
  Top Layer w0.381: R21.1 R20.1 ; K1.5@121.335,77.609 K1.5@121.412,77.532 ; K2.5@121.368,56.026 K2.5 ; K3.5@121.848,34.48 K3.5@121.912,34.544
  Top Layer w0.5: 3.81,24.13 v1(3.81,26.67) ; v1(13.335,26.67) 17.03,26.67 R5.2 ; R6.2 22.352,26.721 v1(26.899,26.721) R4.2 ; v1(25.908,50.19) 26.796,49.302 R21.1 ; v1(36.678,40.208) 36.703,40.234 R29.1 ; C3.2 37.592,93.222 39.776,91.038 39.776,85.257 ; 46.507,82.702 46.736,82.474 RGB.2 ; OLED.7 95.098,56.083 95.631,56.617 95.631,57.774 C2.2 ; PR1.2@100.609,20.803 PR1.2 100.609,19.087 C4.2
  Top Layer w0.7: 3.81,24.13 10.223,17.717 10.223,13.907 15.265,8.865 ; R8.2 17.704,11.303 15.265,8.865 ; P3.5 18.491,5.639 15.265,8.865 ; v1(50.8,56.896) 51.74,55.956 R24.1 R25.1@51.74,44.896 ; 51.74,36.295 R25.1 ; D2.2 K1.5@121.335,77.609 ; D4.2 K3.5@121.848,34.48 ; D3.2 K2.5@121.368,56.026
  Top Layer w1: C2.2 95.718,68.166 95.66,68.224 v1(95.733,68.224)
  Bottom Layer w0.5: v1(3.683,40.056) 36,40.056 36.005,40.061 36.53,40.061 v1(36.678,40.208) ; v1(3.683,53.899) 8.209,53.899 8.244,53.864 22.234,53.864 v1(25.908,50.19) ; v1(3.81,26.67) v1(13.335,26.67) 13.462,26.797 13.538,26.721 v1(26.899,26.721) ; v3@104.14,94.772 v3(104.14,94.996) ; 112.397,86.438 112.473,86.438
  Bottom Layer w0.7: PWR_DISCONNECT.1 36.83,76.454 50.8,62.484 v1(50.8,56.896)
  Bottom Layer w1: v1(95.733,68.224) 95.728,68.229 95.728,69.769 112.397,86.438 ; PR1.2 100.609,20.912 100.859,21.162 100.859,21.254 101.53,21.924 103.405,23.8 118.491,23.8 121.38,26.689 K3.5 ; K1.5@121.318,77.47 K1.5
  Bottom Layer w2: v3@104.14,94.772 112.473,86.438 K1.5 123.952,74.96 123.952,56.038 ; K3.5 123.952,37.116 123.952,56.038 ; K2.5 123.952,56.038
GND: BR1.2 C1.1 C2.1 C3.1 C4.1 C5.2 CIN1.1 CIN2.2 D1.1 IC1.2 IC1.4 IC1.9 LED1.1 LED2.1 LED3.1 LED4.1 LED_A/C.1 LED_FAN.1 LED_HEAT.2 OLED.8 P1.1 P2.18 P3.1 PL1.1 PR1.1 Q1.2 Q2.2 Q3.2 R2.1 R11.1 R_GROUND.2 RGB.1 RTSET1.1 SW1.4 SW2.4 SW3.4 SW4.4 U1.2 | length 382.5
  Top Layer w0.3: 18.085,16.624 U1.2@18.636,16.624
  Top Layer w0.381: P1.1 P2.18 P2.18@31.758,93.218 ; v1(15.824,20.93) 15.824,17.424 16.612,16.637 18.072,16.637 ; R11.1 19.113,8.192 19.685,7.62 29.286,7.62 33.452,11.786 v1(33.452,14.097) 33.325,14.224 23.839,14.224 23.294,14.77 23.294,14.804 23.206,14.892 22.709,14.892 C1.1@22.35,15.251 ; LED_A/C.1 42.672,90.424 43.688,89.408 v1(47.752,89.408) ; LED_FAN.1@47.752,91.44 v1(47.752,89.408) ; v1(48.158,34.519) 48.238,34.598 SW4.4 ; LED_HEAT.2 51.198,89.408 v1(47.752,89.408) ; SW3.4 66.088,30.84 69.093,30.84 75.87,37.617 ; SW1.4 66.368,49.566 66.878,49.056 66.878,48.706 72.849,42.735 v1(79.248,42.735) 79.248,40.996 75.87,37.617 ; SW2.4@66.185,40.335 SW2.4 73.294,40.168 75.844,37.617 75.87,37.617 ; 72.441,91.948 73.101,91.948 74.105,90.944 IC1.4 ; IC1.9 IC1.9@76.049,86.944 ; IC1.9@76.645,87.54 IC1.2 76.645,91.53 76.962,91.846 76.962,93.915 RTSET1.1 ; 80.086,86.944 80.427,86.944 ; CIN1.1@82.08,85.292 82.08,85.142 82.464,84.757 CIN1.1 ; CIN2.2 89.865,92.29 CIN2.2@89.865,91.669 ; OLED.8@97.619,54.839 97.619,56.59 97.331,56.878 97.331,57.827 97.271,57.887 97.271,69.686 100.203,72.619 108.119,72.619 108.92,71.818 108.97,71.818 109.179,71.608 Q1.2 ; C4.1 C4.1@102.656,18.565 ; v1(109.245,14.097) 109.256,14.107 Q3.2 ; Q2.2 109.611,40.681 v1(109.652,40.64) ; LED4.1 124.306,17.096 v1(124.409,16.993) 124.512,17.096 LED3.1 ; LED2.1 LED1.1
  Top Layer w0.5: C4.1@102.656,18.565 103.149,19.059 PR1.1 ; PL1.1@103.099,5.563 PL1.1
  Top Layer w0.7: C5.2 69.919,79.793 C5.2@70.644,79.068 ; C5.2@70.282,79.431 71.156,78.556 73.139,78.556 R2.1 73.177,77.267 76.149,74.295 D1.1
  Top Layer w1: P2.18@31.758,93.218 31.854,93.314 32.072,93.314 32.106,93.347 36.142,93.347 36.192,93.397 C3.1@36.192,93.472
  Top Layer w1.5: IC1.9@76.049,86.944 80.086,86.944 85.571,92.429 CIN2.2 89.726,91.679 90.226,91.179 90.249,91.179 93.419,88.009 ; 80.427,86.944 CIN1.1@82.08,85.292 ; BR1.2 97.54,83.865 93.408,87.998 93.419,88.009 ; R_GROUND.2 95.275,89.865 93.419,88.009
  Top Layer w2.4: IC1.9@76.005,86.9 IC1.9
  Bottom Layer w0.381: v1(15.824,20.93) 26.01,20.93 32.842,14.097 v1(33.452,14.097) 33.692,14.097 34.023,14.427 53.721,14.427 53.944,14.65 53.944,14.966 53.904,15.006 53.904,15.322 ; v1(48.158,34.519) 48.158,14.91 48.235,14.834 ; RGB.1 49.276,87.376 ; 53.975,10.795 53.975,5.715 P3.1 ; 86.868,42.672 97.638,53.442 OLED.8 ; 92.659,40.64 v1(109.652,40.64) ; 103.099,14.3 103.124,14.275 PL1.1 ; 103.099,14.656 103.149,14.707 PR1.1
  other v1: 132.41,16.993 63.5,87.63 66.04,87.63 68.58,87.63 71.12,87.63 63.5,90.17 66.04,90.17 68.58,90.17 71.12,90.17 63.5,92.71 66.04,92.71 68.58,92.71 71.12,92.71
NetBR1_1: BR1.1 CIN1.2 CIN2.1 IC1.8 | length 29.8
  Top Layer w1.5: 78.779,83.756 79.577,82.957 CIN1.2 85.294,82.957 86.411,84.074 89.371,84.074 CIN2.1 ; CIN2.1@89.726,83.679 92.242,81.164 100.01,81.164 100.889,82.042 100.889,85.024 100.01,85.903 99.968,85.903 99.768,86.102 BR1.1@99.002,86.102
NetC1_2: C1.2 R4.1 U1.5 | length 10.9
  Top Layer w0.3: U1.5 21.13,16.624
  Top Layer w0.381: 21.171,16.612 22.761,16.612 C1.2 22.839,16.594 23.935,16.594 26.899,19.558 R4.1
NetC5_1: C5.1 IC1.6 L1.2 PWR.1 R1.2 | length 32.9
  Top Layer w0.381: IC1.6 75.375,82.664 76.962,81.077 76.962,78.221 ; R1.2 76.962,78.221 ; v1(79.273,78.207) 79.259,78.221 76.962,78.221
  Bottom Layer w0.381: PWR.1 77.8,76.733 v1(79.273,78.207)
  other v1: 57.302,69.672 59.233,71.73 57.302,73.787
NetCBOOT1_1: CBOOT1.1 D1.2 IC1.7 L1.1 | length 38.9
  Top Layer w0.381: CBOOT1.1 80.943,92.354 v1(82.474,92.354)
  Top Layer w0.7: IC1.7 76.632,84.18 76.632,83.017 v1@79.273,80.376
  Top Layer w1: L1.1 80.987,68.617 83.007,70.637 D1.2 83.007,76.606 v1(79.273,80.34) v1@79.273,80.376
  Bottom Layer w0.381: v1(79.273,80.34) 82.474,83.541 v1(82.474,92.354)
NetCBOOT1_2: CBOOT1.2 IC1.1 | length 3.8
  Top Layer w0.381: IC1.1 78.05,89.752 78.05,90.521 79.324,91.796 CBOOT1.2@79.324,92.875
NetD2_1: D2.1 K1.2 Q1.3 | length 18.3
  Top Layer w0.381: Q1.3@108.261,73.59 Q1.3 112.065,73.558 D2.1
  Top Layer w0.7: D2.1 112.116,70.688 117.272,65.532 K1.2@121.412,65.532
NetD3_1: D3.1 K2.2 Q2.3 | length 17.2
  Top Layer w0.381: Q2.3 112.566,51.892 D3.1
  Top Layer w0.7: D3.1 112.7,50.038 118.7,44.038 K2.2
NetD4_1: D4.1 K3.2 Q3.3 | length 18.1
  Top Layer w0.381: Q3.3 112.15,30.362 D4.1
  Top Layer w0.7: D4.1 112.268,28.448 118.172,22.544 K3.2@121.912,22.544
NetIC1_3: IC1.3 RTSET1.2 | length 4.5
  Top Layer w0.381: RTSET1.2 75.16,91.54 75.387,91.313 75.387,89.629 IC1.3
NetIC1_5: IC1.5 R1.1 R2.2 | length 6.5
  Top Layer w0.381: IC1.5 74.105,81.522 73.712,81.129 73.712,81.004 73.302,80.594 73.455,80.442 74.193,80.442 74.592,80.043 75.594,80.043 R1.1
NetJ1_1: J1.1 K3.3 | length 80.9
  Bottom Layer w2: J1.1 114.499,95.416 114.499,94.797 127.33,81.966 127.33,28.794 K3.3
NetJ1_2: J1.2 K2.3 | length 58
  Bottom Layer w2: J1.2 117.912,95.457 117.999,95.369 117.999,95.361 131.013,82.347 131.013,46.605 K2.3
NetJ1_3: J1.3 K1.3 | length 38.4
  Bottom Layer w0.254: K1.3@133.096,65.532 K1.3@133.612,65.532
  Bottom Layer w2: J1.3 121.445,95.471 121.953,95.471 136.652,80.772 136.652,68.572 K1.3@133.612,65.532
NetLED1_2: LED1.2 R3.1 | length 4
  Top Layer w0.381: R3.1 LED1.2
NetLED2_2: LED2.2 R9.1 | length 4
  Top Layer w0.381: R9.1 LED2.2
NetLED3_2: LED3.2 R10.1 | length 4
  Top Layer w0.381: R10.1 LED3.2
NetLED4_2: LED4.2 R15.1 | length 4
  Top Layer w0.381: R15.1 LED4.2
NetLED_A/C_2: LED_A/C.2 R19.1 | length 2.1
  Top Layer w0.381: R19.1 42.825,94.558 LED_A/C.2@42.85,94.533
NetLED_FAN_2: LED_FAN.2 R18.1 | length 3.3
  Top Layer w0.381: LED_FAN.2@47.64,94.135 47.64,94.465 47.64,94.533 LED_FAN.2@47.64,94.952 ; LED_FAN.2@47.712,94.135 R18.1
NetLED_HEAT_1: LED_HEAT.1 R17.1 | length 2.2
  Top Layer w0.381: R17.1 52.599,94.656 LED_HEAT.1
NetOLED_1: OLED.1 P2.1 R6.1 R21.2 RGB.3 U1.6 | length 139.7
  Top Layer w0.3: U1.6@20.756,17.274 21.185,17.274
  Top Layer w0.381: U1.6 20.701,26.772 R6.1 ; R6.1@20.701,26.797 20.701,40.513 27.456,47.268 27.456,47.467 27.74,47.752 R21.2 29.337,47.752 P2.1 ; v1(79.756,58.42) 79.756,55.125 79.654,55.023 OLED.1@79.839,54.839
  Bottom Layer w0.381: P2.1 40.183,50.038 43.688,46.533 71.533,46.533 OLED.1@79.839,54.839 ; RGB.3 65.024,58.42 v1(79.756,58.42)
NetOLED_2: OLED.2 P2.2 R5.1 R20.2 RGB.4 U1.1 | length 150
  Top Layer w0.3: 18.085,17.274 18.638,17.274 U1.1@18.694,17.331
  Top Layer w0.381: U1.1@18.694,17.331 18.694,26.784 R5.1 ; R5.1@18.751,26.797 18.751,44.938 27.161,53.348 27.655,53.348 R20.2 29.171,53.633 30.226,52.578 P2.2 ; RGB.4 RGB.4@41.732,79.172
  Bottom Layer w0.381: P2.2 44.145,52.578 49.124,47.6 70.942,47.6 77.724,54.381 77.724,57.302 ; RGB.4 63.246,57.658 63.271,57.658 63.627,57.302 77.724,57.302 ; OLED.2@82.379,54.839 79.915,57.302 77.724,57.302
NetOLED_3: OLED.3 P1.7 | length 85.7
  Top Layer w0.381: P1.7 15.062,71.679 35.154,71.679 47.092,59.741 80.017,59.741 OLED.3@84.919,54.839
NetOLED_4: OLED.4 P1.6 | length 89.3
  Top Layer w0.381: P1.6 15.062,74.219 33.96,74.219 47.625,60.554 81.744,60.554 OLED.4@87.459,54.839
NetOLED_5: OLED.5 P1.5 | length 92.9
  Top Layer w0.381: P1.5 8.915,83.058 15.215,76.759 32.893,76.759 48.311,61.341 83.496,61.341 OLED.5@89.999,54.839
NetP1_2: P1.2
NetP1_3: P1.3 | length 0.3
  Bottom Layer w0.381: P1.3 P1.3@8.941,88.316
NetP1_4: P1.4
NetP1_8: P1.8 R17.2 | length 59
  Top Layer w0.381: v1(26.035,99.695) 27.076,100.736 50.085,100.736 R17.2@52.219,98.603
  Bottom Layer w0.381: P1.8 8.89,75.438 26.035,92.583 v1(26.035,99.695)
NetP1_9: P1.9 R18.2 | length 54.6
  Top Layer w0.381: v1(27.534,98.527) 28.677,99.67 45.364,99.67 46.431,98.603 R18.2
  Bottom Layer w0.381: P1.9 8.915,72.898 27.356,91.338 27.356,97.859 27.363,97.867 27.363,98.356 v1(27.534,98.527)
NetP1_10: P1.10 R19.2 | length 49.9
  Top Layer w0.381: v1(28.575,97.155) 30.023,98.603 R19.2@42.85,98.603
  Bottom Layer w0.381: P1.10 8.865,70.358 28.575,90.068 v1(28.575,97.155)
NetP1_11: P1.11
NetP1_12: P1.12
NetP1_13: P1.13
NetP1_14: P1.14
NetP1_15: P1.15 R22.2 | length 46
  Top Layer w0.381: v1(48.26,58.42) 48.326,58.354 R22.2
  Bottom Layer w0.381: P1.15 10.008,56.413 46.253,56.413 v1(48.26,58.42)
NetP1_16: P1.16 R23.2 | length 49.3
  Top Layer w0.381: R23.2 v1(54.508,50.317)
  Bottom Layer w0.381: P1.16 29.108,55.118 30.353,53.873 45.923,53.873 49.479,50.317 v1(54.508,50.317)
NetP1_17: P1.17 R26.2 | length 58.9
  Top Layer w0.381: R26.2 v1(53.848,42.443)
  Bottom Layer w0.381: P1.17 7.595,52.578 6.985,51.968 6.985,46.533 8.052,45.466 50.825,45.466 v1(53.848,42.443)
NetP1_18: P1.18 R27.2 | length 32.5
  Top Layer w0.381: R27.2 36.84,48.539 v1(38.633,48.539)
  Bottom Layer w0.381: P1.18 10.262,48.539 v1(38.633,48.539)
NetP2_3: P2.3 R7.1 U1.3 | length 57.4
  Top Layer w0.3: 18.085,15.974 18.514,15.974
  Top Layer w0.381: 18.085,15.974 11.821,15.974 R7.1 11.773,40.729 26.162,55.118 P2.3
NetP2_4: P2.4 P3.4 R14.1 | length 129.7
  Top Layer w0.381: P2.4 33.249,56.032 33.249,18.821 P3.4 49.251,2.819 58.077,2.819 73.864,18.606 73.864,23.089 77.318,26.543 R14.1
NetP2_5: P2.5 P3.3 R12.1 | length 158.8
  Top Layer w0.381: P2.5 31.623,59.895 32.024,59.494 32.024,59.492 34.093,57.423 34.328,57.188 34.328,20.282 47.625,6.985 ; P3.3 47.625,6.985 ; R12.1 105.186,49.713 85.725,30.251 75.921,30.251 68.885,23.216 68.885,18.364 58.039,7.518 48.158,7.518 47.625,6.985
NetP2_6: P2.6 P3.2 R13.1 | length 140.7
  Top Layer w0.381: P2.6 35.408,58.953 35.408,24.917 51.435,8.89 51.435,8.674 v1(51.511,8.598) ; P3.2@51.401,5.749 53.01,4.14 56.896,4.14 71.324,18.568 71.324,23.039 76.962,28.677 86.578,28.677 105.17,47.268 105.395,47.268 105.679,47.552 R13.1
  Bottom Layer w0.381: v1(51.511,8.598) 51.511,6.156 P3.2@51.617,6.05
NetP2_7: P2.7 PR1.17 | length 63
  Top Layer w0.381: P2.7 31.648,65.278 44.323,52.603 44.323,29.743 53.289,20.777 PR1.17@62.82,20.777
NetP2_8: P2.8 PR1.16 | length 65.4
  Top Layer w0.381: P2.8 31.877,67.818 46.152,53.543 46.152,32.156 55.495,22.813 63.014,22.813 PR1.16
NetP2_9: P2.9
NetP2_10: P2.10
NetP2_11: P2.11
NetP2_12: P2.12
NetP2_13: P2.13
NetP2_14: P2.14
NetP2_15: P2.15
NetP2_16: P2.16 PWR_DISCONNECT.2 | length 6.1
  Top Layer w0.381: PWR_DISCONNECT.2@36.805,90.195 PWR_DISCONNECT.2
  Top Layer w0.8: P2.16 33.68,90.195 PWR_DISCONNECT.2@36.805,90.195
NetP2_17: P2.17
NetPL1_2: PL1.2
NetPL1_3: PL1.3 PR1.3 | length 15.3
  Top Layer w0.5: PL1.3@98.069,5.563 PR1.3@98.069,20.803
  Top Layer w1: PL1.3 PL1.3@98.069,5.563
NetPL1_3: 
NetPL1_4: PL1.4
NetPL1_5: PL1.5
NetPL1_6: PL1.6
NetPL1_7: PL1.7
NetPL1_8: PL1.8
NetPL1_9: PL1.9
NetPL1_10: PL1.10
NetPL1_11: PL1.11
NetPL1_12: PL1.12
NetPL1_13: PL1.13
NetPL1_14: PL1.14 R15.2 | length 54.6
  Top Layer w0.381: PL1.14 71.399,4.242 120.955,4.242 122.428,5.715 R15.2
NetPL1_15: PL1.15 R10.2 | length 62.3
  Top Layer w0.381: PL1.15 69.748,3.353 124.689,3.353 126.327,4.991 126.327,6.795 R10.2
NetPL1_16: PL1.16 R9.2 | length 69.9
  Top Layer w0.381: PL1.16 68.275,2.286 128.026,2.286 130.404,4.664 R9.2
NetPL1_17: PL1.17 R3.2 | length 77.2
  Top Layer w0.381: PL1.17 66.878,1.143 130.454,1.143 134.366,5.055 134.366,6.858 R3.2
NetPR1_4: PR1.4
NetPR1_5: PR1.5
NetPR1_6: PR1.6
NetPR1_7: PR1.7
NetPR1_8: PR1.8
NetPR1_9: PR1.9
NetPR1_10: PR1.10
NetPR1_11: PR1.11
NetPR1_12: PR1.12
NetPR1_13: PR1.13
NetPR1_14: PR1.14
NetPR1_15: PR1.15
NetQ1_1: Q1.1 R12.2 | length 3
  Top Layer w0.381: R12.2 107.213,68.783 107.213,71.492 Q1.1
NetQ2_1: Q2.1 R13.2 | length 2.2
  Top Layer w0.381: R13.2 107.579,49.76 Q2.1
NetQ3_1: Q3.1 R14.2 | length 2.4
  Top Layer w0.381: R14.2 106.294,26.768 106.579,27.053 106.804,27.053 107.315,27.564 107.315,28.322 Q3.1
NetR8_1: R8.1 R11.2 U1.4 | length 7.1
  Top Layer w0.3: U1.4@20.729,15.974 21.158,15.974
  Top Layer w0.381: R11.2 R8.1 20.701,11.341 U1.4
NetR22_1: R22.1 R24.2 SW1.1 | length 5.7
  Top Layer w0.381: R22.1@53.34,56.52 53.54,56.32 R24.2 56.628,54.356 SW1.1
NetR23_1: R23.1 R25.2 SW2.1 | length 5.8
  Top Layer w0.381: R25.2 53.569,44.704 53.822,44.957 53.822,45.643 54.183,46.004 54.183,46.543 54.467,46.827 R23.1 ; R25.2@53.732,44.704 56.882,44.704 SW2.1
NetR26_1: R26.1 R28.2 SW3.1 | length 5.5
  Top Layer w0.381: R28.2@53.732,35.56 54.048,35.56 ; R26.1 54.048,37.458 54.048,35.56 ; SW3.1 54.951,35.27 54.661,35.56 54.048,35.56
NetR27_1: R27.1 R29.2 SW4.1 | length 5.4
  Top Layer w0.381: R27.1@36.444,46.777 36.703,46.517 36.703,44.37 R29.2 ; R29.2@36.703,44.221 38.691,44.221 SW4.1
pads on no net: K1.4 K2.4 K3.4 OLED.6 SW1.2 SW1.3 SW2.2 SW2.3 SW3.2 SW3.3 SW4.2 SW4.3 U1.7
copper on no net:
  other v2: 19.726,16.074 19.726,17.174

## Polygon pours and split planes (outlines as drawn)
+3.3V on Top Layer "+3.3V_L01_P015" (solid, pour order 15): 54.381,88.29 54.356,88.316 54.356,100.584 111.252,100.584 111.252,91.796 97.028,91.796 97.028,95.504 81.788,95.504 81.788,95.834 76.708,95.834 58.598,95.834 59.004,95.834 59.004,88.265
NetC5_1 on Top Layer "NETC5_1_L01_P006" (solid, remove dead copper, pour order 6): 53.353,77.8 60.325,77.8 60.325,80.899 64.287,80.899 64.287,74.778 67.259,71.806 67.259,65.913 54.483,65.913 53.39,65.913
+3.3V on Top Layer "+3.3V_L01_P012" (solid, pour order 12): 59.004,78.308 59.004,88.468 1.27,88.468 1.27,87.605 1.27,86.995 1.27,21.59 6.35,21.59 6.35,83.82 37.465,83.82 38.1,83.185 38.1,81.28 53.34,81.28 53.34,78.308
no net on Top Layer "NONET_L01_P025" (solid, pour order 25): 88.57,63.602
GND on Top Layer "GND_L01_P024" (solid, pour order 24): 70.968,80.823 67.107,80.823 67.056,80.772 67.056,85.522 70.968,85.522
no net on Top Layer "NONET_L01_P020" (solid, pour order 20): 67.056,80.772
no net on Top Layer "NONET_L01_P017" (solid, pour order 17): 57.912,95.504
no net on Top Layer "NONET_L01_P016" (solid, pour order 16): 59.944,90.932
no net on Top Layer "NONET_L01_P014" (solid, pour order 14): 54.381,88.29
no net on Top Layer "NONET_L01_P013" (solid, pour order 13): 38.1,80.645
GND on Top Layer "GND_L01_P003" (solid, pour order 3): 74.371,88.113 73.152,88.9 72.796,88.951 72.796,94.894 60.884,94.894 60.884,84.912 72.873,84.912 73.685,85.725 74.371,85.725
no net on Top Layer "NONET_L01_P004" (solid, pour order 4): 68.631,99.136
GND on Bottom Layer "GND_L02_P026" (solid, pour order 26): 56.515,94.615 56.515,100.965 101.6,100.965 102.235,100.33 102.235,78.105 93.98,69.85 93.98,52.705 97.155,52.705 97.028,52.578 97.028,47.244 76.2,47.244 81.661,52.705 83.464,52.705 83.464,93.345 72.39,93.345
GND on Bottom Layer "GND_L02_P010" (solid, pour order 10): 29.413,17.907 29.413,9.83 149.428,9.83 149.428,88.392 142.443,88.392 142.443,20.447 139.903,17.907
GND on Bottom Layer "GND_L02_P019" (solid, pour order 19): 30.48,94.996 72.644,94.996 72.644,84.836 30.48,84.836
GND on Bottom Layer "GND_L02_P018" (solid, pour order 18): 75.692,17.78 76.2,18.288 76.2,47.244 97.028,47.244 97.028,17.78
no net on Bottom Layer "NONET_L02_P011" (solid, pour order 11): 139.065,10.795

## Silkscreen, mask and mechanical layers (free items; w line width, h text height)
Top Overlay:
  text "G" at 114.046,99.517 h1.52
  text "Y" at 117.424,99.517 h1.52
  text "C" at 133.02,99.517 h1.52
  text "Rc" at 136.119,99.517 h1.52
  text "W" at 120.929,99.466 h1.52
  text "Venti Smart Thermostat: Rev.1 /  / Designed By: / Lyubomyr Bilyk, / Ferencz Dominguez, / Liam Robinson" at 11.43,90.805 h0.64
Bottom Overlay:
  drawing of 27 lines, arcs and shapes, not listed
Mechanical 1:
  lines w0.254: 0,101.6 0.051,101.549 0.051,0.025 152.375,0.025 152.4,0.051 152.4,101.6 0,101.6